# Altium PCB main.PcbDoc (part 2 of 2)
Units mm, origin at the board's own origin, x right, y up, seen from the top; angles counter-clockwise.
Board outline 184.25 x 118.77 mm, 4 copper layers (TopLayer, GND, VCC, BottomLayer); 161 components, 153 nets, 675 pads, 230 vias.
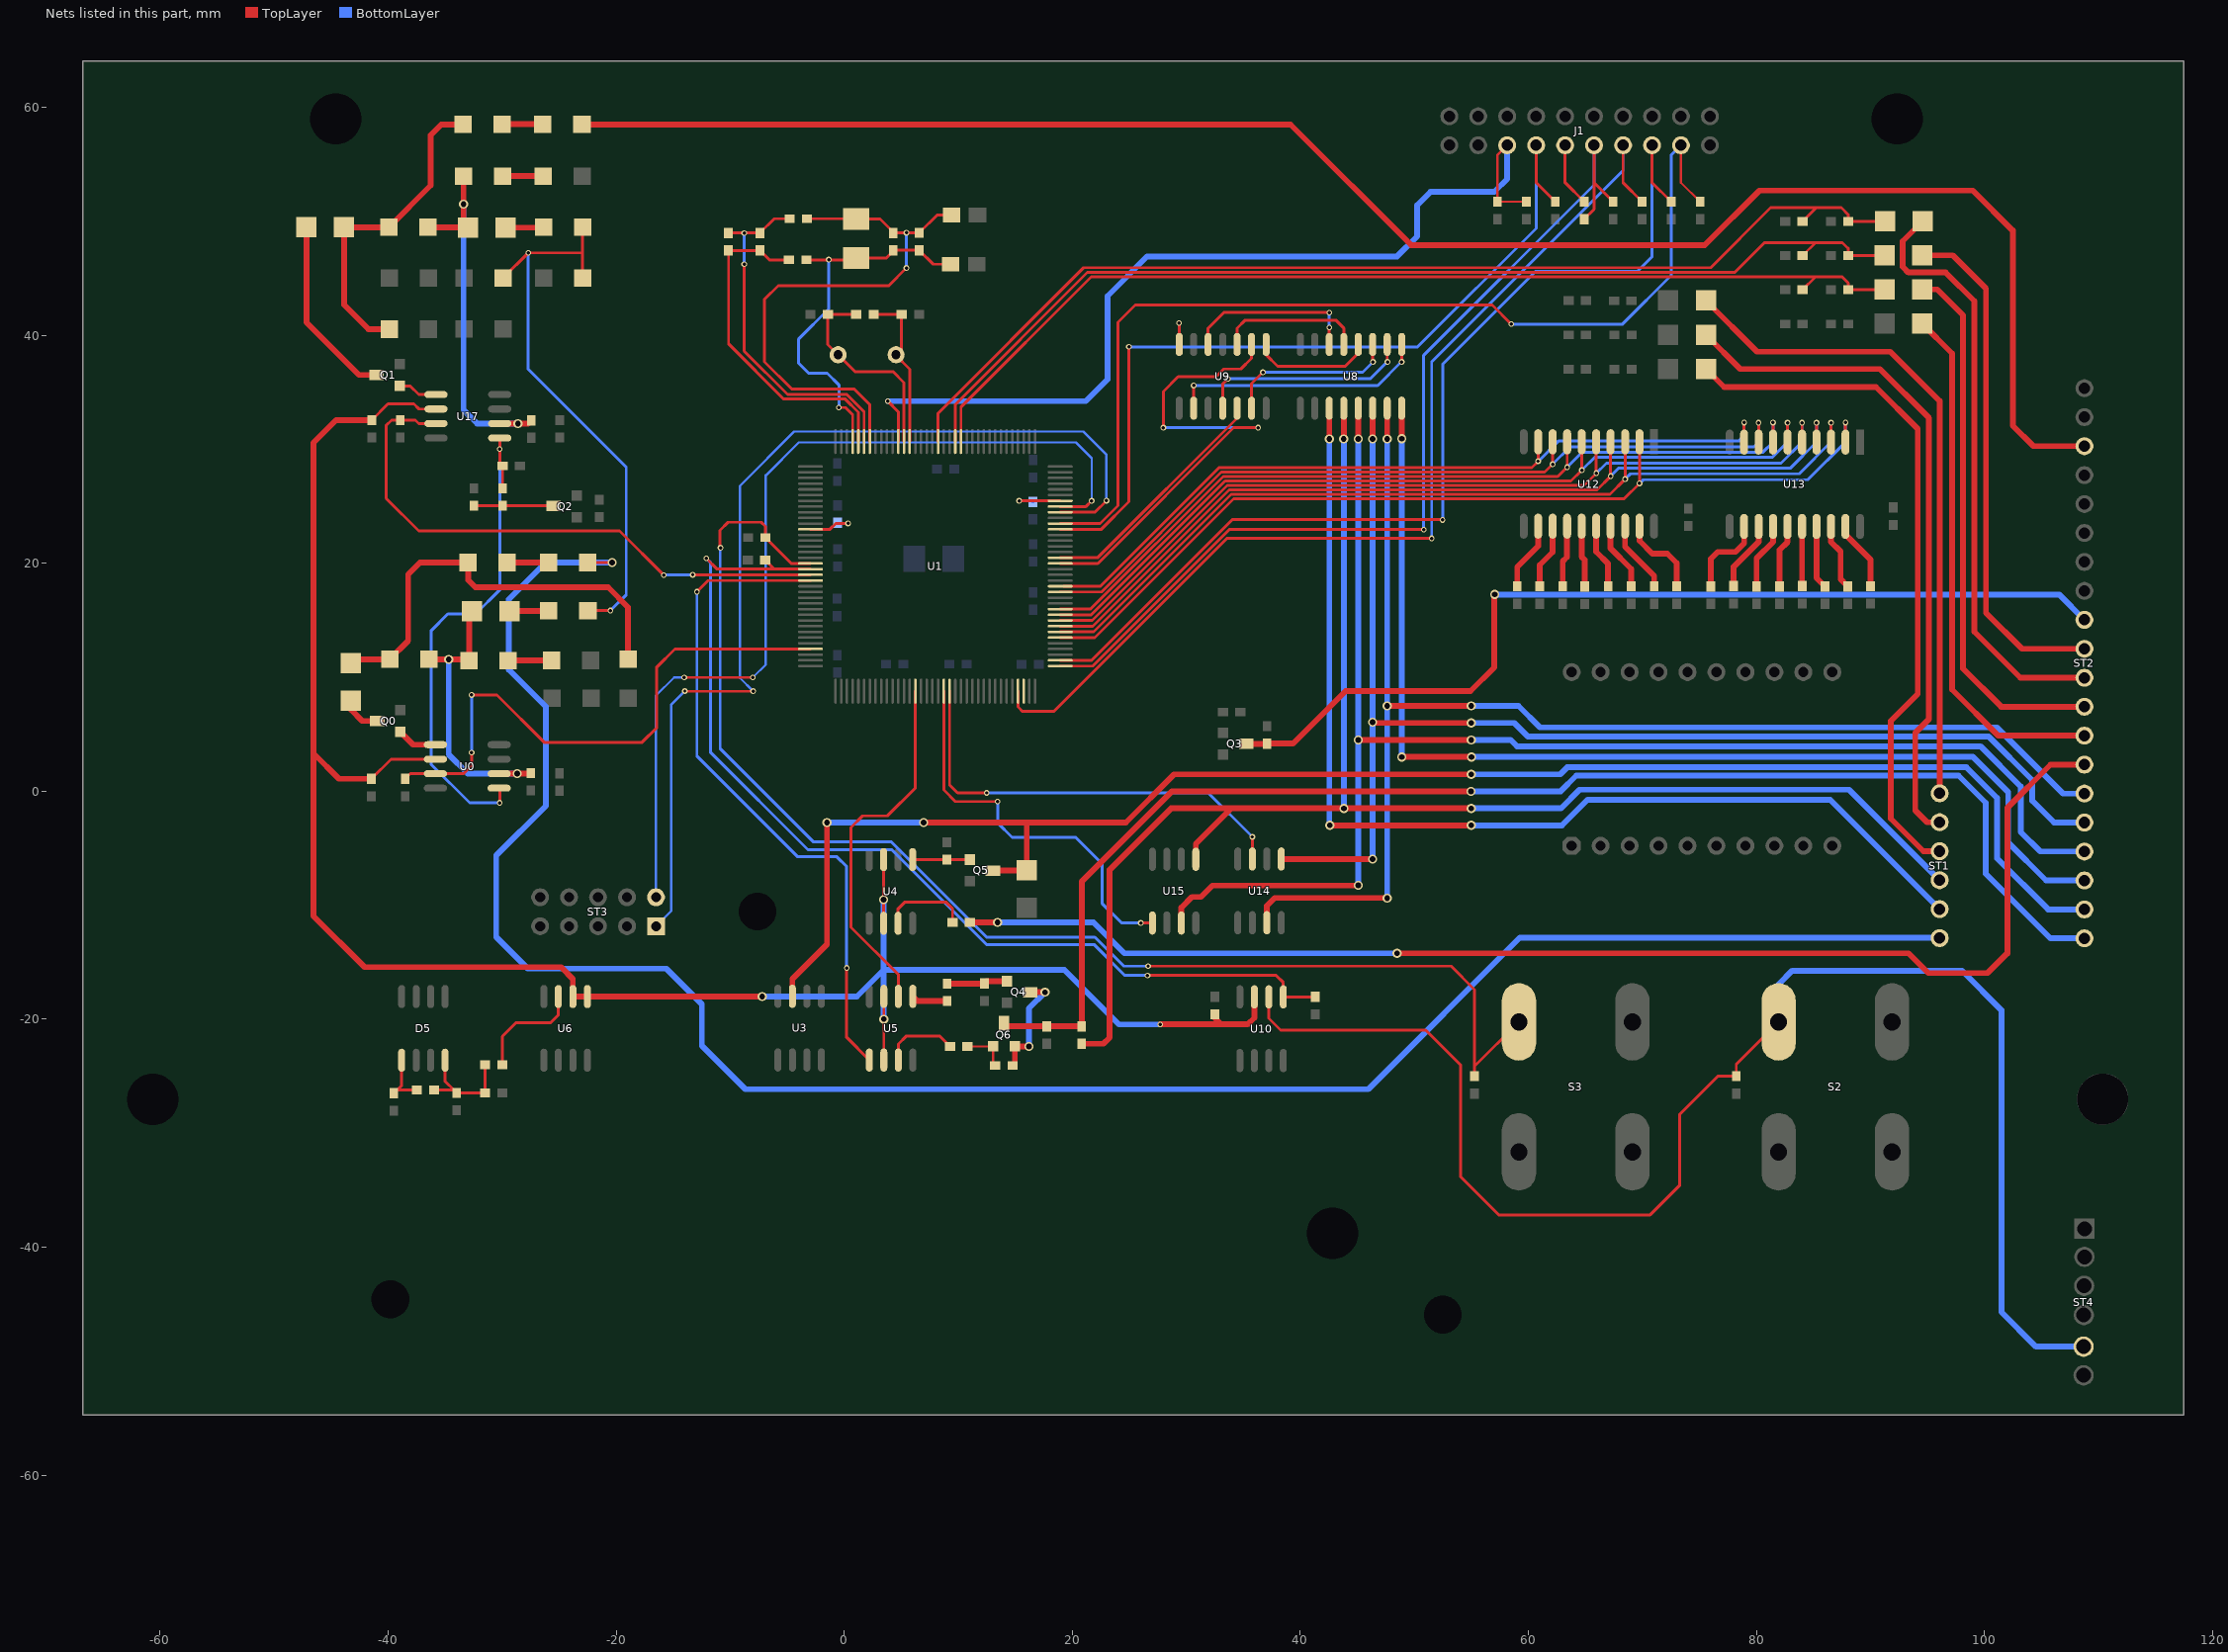
[diagram p4: the nets of this part, all layers, seen from the top]

## Via types
v1: diameter 0.5, hole 0.3, TopLayer to BottomLayer, 125 vias
v2: diameter 0.8, hole 0.5, TopLayer to BottomLayer, 97 vias
v3: diameter 1.27, hole 0.8, TopLayer to BottomLayer, 6 vias
v4: diameter 1.5, hole 0.8, TopLayer to BottomLayer, 2 vias

## Nets (pads, with @x,y where several pads share a name; then routed paths per layer and width w, separated by ;. In a path a pad name is that pad's centre, name@x,y a point inside that pad or via, vN(x,y) a via of type N, cw(c..) or ccw(c..) an arc to the next point about the centre after c; other vN are vias at no path point) (continued)
J1-1#: D6.2 ST2.11 | length 52.6
  TopLayer w0.508: D6.2@94.564,49.987 92.82,48.243 92.82,46.02 93.33,45.51 96.59,45.51 99.1,43 99.1,14 103.143,9.957 ST2.11@108.763,9.957
J1-2#: D7.2 ST2.10 | length 45.2
  TopLayer w0.508: D7.2@94.539,47.015 97.215,47.015 100.13,44.1 100.13,15.65 103.283,12.497 ST2.10@108.763,12.497
J1-3#: ST2.18 U8.16 | length 97.5
  TopLayer w0.508: v2(48.886,30.926) U8.16@48.886,33.603 ; v2@48.936,3.01 v2(55,3.01)
  BottomLayer w0.508: v2(48.886,3.01) v2(48.886,30.926) ; v2(55,3.01) 98.99,3.01 102.08,-0.08 102.08,-4.51 105.393,-7.823 ST2.18@108.763,-7.823
J1-5#: R49.2 ST2.3 | length 157.4
  TopLayer w0.508: R49.2@-23,58.49 39.14,58.49 49.73,47.9 75.46,47.9 80.26,52.7 98.97,52.7 102.48,49.19 102.48,32.08 104.283,30.277 ST2.3@108.763,30.277
J1-9#: D8.2 ST2.13 | length 46.5
  TopLayer w0.508: D8.2@94.539,41.021 97.15,38.41 97.15,8.93 101.203,4.877 ST2.13@108.763,4.877
J1-10#: D9.2 ST2.12 | length 47.5
  TopLayer w0.508: D9.2@94.539,44.018 95.852,44.018 98.11,41.76 98.11,10.77 101.463,7.417 ST2.12@108.763,7.417
J1-11#: ST2.15 U8.15 U14.3 | length 119.6
  TopLayer w0.508: U14.3@37.059,-11.532 37.059,-10.051 37.76,-9.35 v2@47.616,-9.35 ; v2(47.616,7.49) v2(54.98,7.49) ; v2(47.616,30.916) U8.15@47.616,33.603
  BottomLayer w0.508: v2(47.616,-9.38) v2(47.616,30.916) ; v2(54.98,7.49) 59.12,7.49 61.01,5.6 101.09,5.6 106.893,-0.203 ST2.15@108.763,-0.203
J1-12#: R18.2 ST2.14 | length 114.6
  TopLayer w0.508: R18.2@11.024,-11.506 v2(13.446,-11.506) ; v2(48.48,-14.21) 93.34,-14.21 95.08,-15.95 100.27,-15.95 102,-14.22 102,-1.458 105.795,2.337 ST2.14@108.763,2.337
  BottomLayer w0.508: v2(13.446,-11.506) 21.856,-11.506 24.56,-14.21 v2(48.48,-14.21)
J1-13#: Q6.3 R17.2 R20.1 ST2.20 | length 121
  TopLayer w0.508: Q6.3@14.026,-20.349 14.301,-20.624 R17.2@20.827,-20.624 20.827,-7.923 28.75,0 v2(54.97,0)
  BottomLayer w0.508: v2(54.97,0) 62.83,0 64.21,1.38 97.72,1.38 100.11,-1.01 100.11,-7.23 105.783,-12.903 ST2.20@108.763,-12.903
J1-14#: Q3.3 R40.1 ST2.9 | length 83.6
  TopLayer w0.508: Q3.3@35.255,4.166 37.062,4.166 R40.1@37.076,4.18 39.36,4.18 43.97,8.79 54.93,8.79 57,10.86 v2@57,17.26
  BottomLayer w0.508: v2@57,17.26 106.54,17.26 ST2.9@108.763,15.037
  other v2: 57.04,17.26
J1-15#: D4.2 Q5.3 ST2.19 U3.3 | length 144.2
  TopLayer w0.508: U3.3@-4.547,-17.983 -4.547,-16.467 -1.51,-13.43 v2(-1.51,-2.738) ; v2(6.972,-2.738) 24.692,-2.738 28.92,1.49 v2(54.99,1.49) ; Q5.3@13.03,-6.96 15.977,-6.96 D4.2@16.002,-6.934 16.002,-2.738
  BottomLayer w0.508: v2@-1.472,-2.738 v2(6.972,-2.738) ; v2(54.99,1.49) 62.79,1.49 63.4,2.1 98.42,2.1 101.11,-0.59 101.11,-5.89 105.583,-10.363 ST2.19@108.763,-10.363
J1-16#: ST2.16 U8.14 U14.5 | length 114.7
  TopLayer w0.508: U14.5@38.329,-5.944 v2@46.346,-5.94 ; v2@46.346,6 v2(54.98,6) ; v2(46.346,30.914) U8.14@46.346,33.603
  BottomLayer w0.508: v2(46.346,-5.96) v2(46.346,30.914) ; v2(54.98,6) 58.77,6 59.98,4.79 100.38,4.79 104.18,0.99 104.18,-0.82 106.103,-2.743 ST2.16@108.763,-2.743
  other v2: 46.346,6.06
J1-17#: ST2.17 U8.13 U15.3 | length 129.6
  TopLayer w0.508: U15.3@29.566,-11.557 29.566,-10.204 30.5,-9.27 31.29,-9.27 32.29,-8.27 45.066,-8.27 v2@45.076,-8.28 ; v2(45.076,4.5) v2(54.98,4.5) ; v2(45.076,30.916) U8.13@45.076,33.603
  BottomLayer w0.508: v2@45.076,-8.28 v2(45.076,30.916) ; v2(54.98,4.5) 58.45,4.5 59,3.95 99.64,3.95 103.17,0.42 103.17,-3.56 104.893,-5.283 ST2.17@108.763,-5.283
  other v2: 45.076,-8.25
J2-1#: D10.2 ST1.1 | length 58.6
  TopLayer w0.508: D10.2@75.565,43.049 80.054,38.56 91.74,38.56 96.063,34.237 ST1.1@96.063,-0.178
J2-2#: D11.2 ST1.2 | length 60.1
  TopLayer w0.508: D11.2@75.565,40.052 78.577,37.04 90.83,37.04 95.13,32.74 95.13,6.33 93.93,5.13 93.93,-1.69 94.958,-2.718 ST1.2@96.063,-2.718
J2-3#: D12.2 ST1.3 | length 61.4
  TopLayer w0.508: D12.2@75.565,37.054 77.159,35.46 90.48,35.46 94.14,31.8 94.14,8.53 91.78,6.17 91.78,-2.39 94.648,-5.258 ST1.3@96.063,-5.258
J2-4#: R17.1 ST1.4 U8.12 U15.5 | length 137.3
  TopLayer w0.508: R17.1@20.827,-22.148 22.732,-22.148 23.28,-21.6 23.28,-6.89 28.67,-1.5 v2(54.98,-1.5) ; U15.5@30.836,-5.969 30.836,-4.604 33.94,-1.5 ; v2@43.806,-1.48 v2(43.826,-1.5) ; v2(43.806,30.914) U8.12@43.806,33.603
  BottomLayer w0.508: v2@43.806,-1.5 v2(43.806,30.914) ; v2(54.98,-1.5) 62.85,-1.5 64.49,0.14 88.125,0.14 ST1.4@96.063,-7.798
J2-5#: ST1.5 U8.11 | length 95
  TopLayer w0.508: v2(42.536,30.916) U8.11@42.536,33.603 ; v2(42.576,-2.99) v2(54.98,-2.99)
  BottomLayer w0.508: v2@42.536,-2.99 v2(42.536,30.916) ; v2(54.98,-2.99) 62.94,-2.99 65.19,-0.74 86.465,-0.74 ST1.5@96.063,-10.338
J2-6#: R80.2 ST1.6 | length 185.2
  TopLayer w0.254: R80.2@-22.492,20.063 v2(-20.363,20.063)
  BottomLayer w0.508: v2(-20.363,20.063) -26.19,20.063 -29.42,16.833 -29.42,10.67 -26.17,7.42 -26.17,-1.28 -30.52,-5.63 -30.52,-12.79 -27.75,-15.56 -15.6,-15.56 -12.49,-18.67 -12.49,-22.32 -8.67,-26.14 45.96,-26.14 59.248,-12.852 ST1.6@96.26,-12.852
J9-3: J1.3 R11.1 U1.134 | length 90.8
  TopLayer w0.203: J1.3@73.381,56.667 73.381,53.391 R11.1@75.057,51.714
  TopLayer w0.254: U1.134@18.939,23.483 22.443,23.483 24.01,25.05 24.01,41.14 25.52,42.65 56.82,42.65 v1@58.49,40.98
  BottomLayer w0.254: v1(58.5,40.98) 68.26,40.98 72.53,45.25 72.53,55.817 J1.3@73.381,56.667
J9-5: J1.5 R10.1 U1.110 | length 90
  TopLayer w0.254: U1.110@18.939,11.483 21.69,11.483 34.037,23.83 v1@52.48,23.83 ; J1.5@70.841,56.667 70.841,53.391 R10.1@72.517,51.714
  BottomLayer w0.254: v1(52.48,23.8) 52.48,37.45 60.65,45.62 69.58,45.62 70.841,46.881 J1.5@70.841,56.667
J9-7: J1.7 R9.1 U1.105 | length 91.2
  TopLayer w0.254: U1.105@15.239,8.783 15.239,7.401 15.64,7 18.38,7 33.56,22.18 v1(51.52,22.18) ; J1.7@68.301,56.667 68.301,53.391 R9.1@69.977,51.714
  BottomLayer w0.254: v1(51.52,22.18) 51.52,37.67 68.301,54.451 J1.7@68.301,56.667
J9-9: J1.9 R8.1 R12.2 U1.109 | length 86
  TopLayer w0.254: U1.109@18.939,10.983 21.783,10.983 33.78,22.98 v1@50.82,22.98 ; R12.2@64.897,50.19 65.761,51.054 J1.9@65.761,56.667 ; 65.761,53.391 R8.1@67.437,51.714
  BottomLayer w0.254: v1(50.82,22.95) 50.82,38.25 65.761,53.191 J1.9@65.761,56.667
J9-11: J1.11 R12.1 | length 5.6
  TopLayer w0.254: J1.11@63.221,56.667 63.221,53.391 R12.1@64.897,51.714
J9-13: J1.13 R7.1 U1.133 | length 73.6
  TopLayer w0.254: U1.133@18.939,22.983 22.553,22.983 24.97,25.4 v1(24.97,38.99) ; J1.13@60.681,56.667 60.681,53.391 R7.1@62.357,51.714
  BottomLayer w0.254: v1(24.97,38.99) 50.29,38.99 60.681,49.381 J1.13@60.681,56.667
JDQ_PW1: U1.87 U5.2 | length 32.1
  TopLayer w0.254: U5.2@4.742,-17.993 4.742,-16.072 0.6,-11.93 0.6,-3.17 1.61,-2.16 3.785,-2.16 6.239,0.294 U1.87@6.239,8.783
JDQ_PW2: U1.57 U5.5 | length 59.7
  TopLayer w0.254: v1(-12.92,17.5) -11.937,18.483 U1.57@-2.961,18.483 ; v1(0.214,-15.5) 0.214,-21.593 U5.5@2.202,-23.581
  BottomLayer w0.254: v1(-12.92,17.5) -12.92,3.09 -4.08,-5.75 -0.64,-5.75 0.214,-6.604 v1(0.214,-15.5)
KEY_START: C43.1 R79.2 S3.1 U1.54 | length 117.5
  TopLayer w0.254: v1@-10.88,21.36 -10.89,21.37 -10.89,22.89 -10.18,23.6 -7.28,23.6 -6.909,23.229 R79.2@-6.909,22.25 -4.642,19.983 U1.54@-2.961,19.983 ; v1(26.65,-15.34) 53.22,-15.34 55.27,-17.39 C43.1@55.27,-24.994 ; 55.27,-24.132 S3.1@59.169,-20.233
  BottomLayer w0.254: v1@-10.88,21.36 -10.88,3.74 -2.69,-4.45 4.14,-4.45 12.49,-12.8 21.98,-12.8 24.52,-15.34 v1(26.65,-15.34)
  other v1: -10.85,21.36
KEY_STOP: C42.2 S2.1 ST4.5 U10.2 | length 130.4
  TopLayer w0.254: U10.2@37.236,-18.034 37.236,-19.926 38.26,-20.95 50.99,-20.95 54.07,-24.03 54.07,-33.84 57.39,-37.16 70.68,-37.16 73.25,-34.59 73.25,-28.37 76.626,-24.994 C42.2@78.232,-24.994 78.232,-23.942 S2.1@81.941,-20.233
  BottomLayer w0.508: S2.1@81.941,-20.233 81.941,-16.939 83.14,-15.74 98.02,-15.74 101.48,-19.2 101.48,-45.68 104.517,-48.717 ST4.5@108.616,-48.717
LED1: U1.114 U12.2 U13.2 | length 83
  TopLayer w0.254: U1.114@18.939,13.483 21.973,13.483 34.14,25.65 68.388,25.65 v1(69.748,27.01) U12.2@69.748,30.658 ; U13.2@87.808,30.632 v1(87.808,32.34)
  BottomLayer w0.254: v1(69.748,27.01) 70.068,27.33 84.505,27.33 87.808,30.632 v1(87.808,32.34)
LED2: U1.115 U12.3 U13.3 | length 81.2
  TopLayer w0.254: U1.115@18.939,13.983 21.871,13.983 33.945,26.057 67.157,26.057 68.478,27.378 U12.3@68.478,30.658 ; U13.3@86.538,30.632 v1(86.538,32.334)
  BottomLayer w0.254: v1(68.49,27.388) 68.952,27.85 83.75,27.85 86.538,30.638 v1(86.538,32.334)
LED3: U1.116 U12.4 U13.4 | length 79.4
  TopLayer w0.254: U1.116@18.939,14.483 21.79,14.483 33.757,26.45 66.02,26.45 67.208,27.638 U12.4@67.208,30.658 ; U13.4@85.268,30.632 v1(85.268,32.33)
  BottomLayer w0.254: v1@67.208,27.66 67.878,28.33 82.96,28.33 85.268,30.638 v1(85.268,32.33)
  other v1: 67.208,27.646
LED4: U1.117 U12.5 U13.5 | length 77.7
  TopLayer w0.254: U1.117@18.939,14.983 21.743,14.983 33.598,26.838 64.898,26.838 65.938,27.878 U12.5@65.938,30.658 ; U13.5@83.998,30.632 v1(83.998,32.334)
  BottomLayer w0.254: v1(65.957,27.907) 66.84,28.79 82.16,28.79 83.998,30.628 v1(83.998,32.334)
LED5: U1.118 U12.6 U13.6 | length 75.9
  TopLayer w0.254: U1.118@18.939,15.483 21.653,15.483 33.397,27.227 63.737,27.227 64.668,28.158 U12.6@64.668,30.658 ; U13.6@82.728,30.632 v1(82.728,32.334)
  BottomLayer w0.254: v1(64.687,28.167) 65.819,29.3 81.395,29.3 82.728,30.632 v1(82.728,32.334)
LED6: U1.119 U12.7 U13.7 | length 74.2
  TopLayer w0.254: U1.119@18.939,15.983 21.603,15.983 33.23,27.61 62.57,27.61 63.398,28.438 U12.7@63.398,30.658 ; U13.7@81.458,30.632 v1(81.458,32.34)
  BottomLayer w0.254: v1(63.398,28.432) 64.718,29.75 80.575,29.75 81.458,30.632 v1(81.458,32.34)
LED7: U1.122 U12.8 U13.8 | length 72.1
  TopLayer w0.254: U1.122@18.939,17.483 22.563,17.483 33.077,27.997 61.437,27.997 v1(62.128,28.686) U12.8@62.128,30.658 ; U13.8@80.188,30.632 v1(80.188,32.33)
  BottomLayer w0.254: v1(62.128,28.686) 63.662,30.22 79.775,30.22 80.188,30.632 v1(80.188,32.33)
LED8: U1.123 U12.9 U13.9 | length 69.7
  TopLayer w0.254: U1.123@19.247,17.983 22.47,17.983 32.867,28.38 60.298,28.38 60.858,28.94 U12.9@60.858,30.658 ; U13.9@78.918,30.632 v1(78.918,32.342)
  BottomLayer w0.254: v1@60.858,28.94 62.668,30.75 78.498,30.75 78.918,31.17 v1(78.918,32.342)
  other v1: 60.858,28.953
LZ_PW: C37.1 U1.56 U17.3 | length 51.1
  TopLayer w0.254: U17.3@-35.802,32.26 -37.319,32.26 -37.624,32.565 -39.695,32.565 -40.16,32.1 -40.16,25.69 -37.32,22.85 -19.7,22.85 v1(-15.815,18.965) ; v1(-13.287,18.983) U1.56@-2.961,18.983
  BottomLayer w0.254: v1@-15.815,18.983 v1(-13.287,18.983)
LZ_PW_2: C53.1 U0.3 U1.69 | length 50.4
  TopLayer w0.254: C53.1@-38.494,1.089 -38.037,1.546 -33.384,1.546 -32.68,2.25 v1(-32.68,3.4) ; v1@-32.68,8.44 -30.46,8.44 -26.315,4.295 -17.725,4.295 -16.44,5.58 -16.44,10.896 -14.853,12.483 U1.69@-2.961,12.483
  BottomLayer w0.254: v1(-32.68,3.4) v1(-32.68,8.45)
NC: U1.106
NetC21_1: C21.1 D5.8 R13.2 R14.2 R16.1 | length 10
  TopLayer w0.254: R14.2@-35.966,-26.213 R13.2@-34.239,-26.213 ; D5.8@-35.001,-23.597 -35.001,-25.451 R13.2@-34.239,-26.213 ; R16.1@-31.496,-24.003 C21.1@-31.496,-26.467 R13.2@-33.985,-26.467 R13.2@-34.239,-26.213
NetC35_2: C35.2 D1.2 R50.1 R51.1 | length 28.4
  TopLayer w0.508: C35.2@-39.891,40.532 -41.721,40.532 -43.866,42.677 -43.866,49.473 R51.1@-39.942,49.473 -36.272,53.142 -36.272,57.558 -35.34,58.49 -33.439,58.49 R50.1@-33.414,58.515
NetC38_1: C38.1 D2.2 R51.2 R53.2 U17.6 | length 33.8
  TopLayer w0.254: C38.1@-27.72,32.26 C38.1@-27.445,32.534
  TopLayer w0.508: R51.2@-36.513,49.473 D2.2@-33.013,49.473 ; D2.2@-33.389,49.849 R53.2@-33.389,53.969 ; U17.6@-30.214,32.26 C38.1@-27.72,32.26
  BottomLayer w0.508: v2@-33.389,51.493 -33.389,33.449 -32.199,32.26 v2(-28.622,32.26)
  other v2: -33.389,51.503
NetC39_1: C39.1 R58.1 U0.5 U17.5 | length 44.9
  TopLayer w0.254: v1(-30.214,-1.014) U0.5@-30.214,0.34 ; U17.5@-30.214,30.99 -30.214,28.801 C39.1@-29.96,28.547 R58.1@-29.96,26.565
  BottomLayer w0.254: v1(-30.214,-1.014) -32.854,-1.014 -36.21,2.342 -36.21,14.1 -34.766,15.544 -32.33,15.544 -30.214,17.66 v1(-30.214,30.02)
NetC50_2: C50.2 D13.2 R81.1 R84.1 | length 38.3
  TopLayer w0.508: D13.2@-43.256,11.557 R84.1@-39.883,11.557 ; R84.1@-39.864,11.576 -38.24,13.2 -38.24,19.02 -37.197,20.063 R81.1@-32.982,20.063 -32.982,18.522 -32.35,17.89 -20.71,17.89 -18.961,16.141 C50.2@-18.961,11.579
NetC51_1: C51.1 D14.2 R83.2 R84.2 U0.6 | length 25.6
  TopLayer w0.508: R84.2@-36.435,11.576 R83.2@-33.015,11.576 ; R83.2@-32.896,11.457 -32.896,15.546 D14.2@-32.642,15.8 ; U0.6@-30.264,1.546 C51.1@-27.547,1.546
  BottomLayer w0.508: v2@-34.69,11.576 -34.69,3.23 -33.006,1.546 v2(-28.68,1.546)
  other v2: -34.684,11.57
NetD1_1: D1.1 Q1.3 | length 16.5
  TopLayer w0.508: D1.1@-47.168,49.505 -47.168,41.139 -42.551,36.522 Q1.3@-40.953,36.522
NetD2_1: D2.1 R54.1 | length 3.3
  TopLayer w0.508: D2.1@-29.68,49.442 -26.409,49.442 R54.1@-26.378,49.473
NetD5_5: D5.5 R14.1 R15.2 | length 4.9
  TopLayer w0.254: R15.2@-39.497,-26.492 -38.811,-25.806 D5.5@-38.811,-23.597 ; R15.2@-39.218,-26.213 R14.1@-37.49,-26.213
NetD13_1: D13.1 Q0.3 | length 3.5
  TopLayer w0.508: D13.1@-43.256,7.95 -43.256,7.156 -42.269,6.169 Q0.3@-40.958,6.169
NetD14_1: D14.1 R85.1 | length 3.5
  TopLayer w0.508: D14.1@-29.34,15.8 -25.962,15.8 R85.1@-25.911,15.851
NetQ0_1: Q0.1 U0.1 | length 3.5
  TopLayer w0.508: Q0.1@-38.926,5.204 -37.808,4.086 U0.1@-35.852,4.086
NetQ1_1: Q1.1 U17.1 | length 3.5
  TopLayer w0.254: Q1.1@-38.977,35.557 -38.066,35.557 -37.309,34.8 U17.1@-35.802,34.8
NetQ2_3: Q2.3 R58.2 R59.1 | length 7
  TopLayer w0.254: R59.1@-32.474,25.041 Q2.3@-25.515,25.041
NetQ4_1: Q4.1 R23.2 R24.1 | length 5.3
  TopLayer w0.508: R23.2@9.016,-16.88 12.279,-16.88 12.496,-16.663 Q4.1@14.274,-16.663
NetQ4_3: Q4.3 Q6.2 R22.2 | length 9.6
  TopLayer w0.508: R22.2@14.762,-24.057 14.966,-23.854 Q6.2@14.966,-22.381 v2(16.189,-22.381) ; Q4.3@16.306,-17.628 v2(17.608,-17.628)
  BottomLayer w0.508: v2(16.189,-22.381) 16.189,-19.047 v2(17.608,-17.628)
NetQ5_1: Q5.1 R19.1 U4.1 | length 5
  TopLayer w0.254: U4.1@5.994,-5.994 Q5.1@10.998,-5.994
NetQ6_1: Q6.1 R21.2 R22.1 | length 4
  TopLayer w0.203: R21.2@10.8,-22.381 Q6.1@13.061,-22.381 13.061,-23.879 R22.1@13.238,-24.057
NetR5_1: R5.1 U1.138 | length 4.8
  TopLayer w0.254: v1(15.343,25.483) U1.138@18.939,25.483
  BottomLayer w0.254: v1(15.343,25.483) 16.427,25.483 R5.1@16.535,25.375
NetR6_1: R6.1 U1.48 | length 4.4
  TopLayer w0.254: U1.48@-2.961,22.983 -1.257,22.983 -0.74,23.5 v1(0.34,23.5)
  BottomLayer w0.254: R6.1@-0.538,23.5 v1(0.34,23.5)
NetR16_2: R16.2 U6.3 | length 9.8
  TopLayer w0.254: R16.2@-29.972,-24.003 -29.972,-21.502 -28.76,-20.29 -25.727,-20.29 -25.07,-19.632 U6.3@-25.07,-18.009
NetR18_1: R18.1 U4.7 | length 7.7
  TopLayer w0.254: U4.7@4.724,-11.582 4.724,-10.306 5.29,-9.74 8.94,-9.74 9.5,-10.3 R18.1@9.5,-11.506
NetR21_1: R21.1 U5.7 | length 6.6
  TopLayer w0.254: U5.7@4.742,-23.581 4.742,-22.168 5.42,-21.49 8.385,-21.49 R21.1@9.276,-22.381
NetR23_1: R23.1 U5.1 | length 3.2
  TopLayer w0.508: U5.1@6.012,-17.993 6.423,-18.404 R23.1@9.016,-18.404
NetR49_1: R49.1 R50.2 | length 3.5
  TopLayer w0.508: R50.2@-29.985,58.515 R49.1@-26.454,58.515
NetR52_2: R52.2 R53.1 | length 3.6
  TopLayer w0.508: R53.1@-29.96,53.969 R52.2@-26.404,53.969
NetR54_2: R54.2 R55.1 R57.1 R85.2 | length 49.8
  TopLayer w0.254: R55.1@-29.909,45.033 v1(-27.709,47.233) -22.949,47.233 ; R57.1@-22.949,45.003 R54.2@-22.949,49.473 ; R85.2@-22.482,15.851 v1(-20.5,15.851)
  BottomLayer w0.254: v1(-27.709,47.233) -27.709,37.029 -19.12,28.44 -19.12,17.231 v1(-20.5,15.851)
NetR62_1: R62.1 U12.19 | length 7.4
  TopLayer w0.508: U12.19@69.748,23.258 69.748,21.972 70.87,20.85 72.18,20.85 73.012,20.018 R62.1@73.012,17.977
NetR63_1: R63.1 U12.18 | length 6.3
  TopLayer w0.508: U12.18@68.478,23.258 68.478,21.452 71.031,18.899 R63.1@71.031,17.977
NetR64_1: R64.1 U12.17 | length 6
  TopLayer w0.508: U12.17@67.208,23.258 67.208,21.312 69.024,19.496 R64.1@69.024,17.977
NetR65_1: R65.1 U12.16 | length 5.7
  TopLayer w0.508: U12.16@65.938,23.258 65.938,21.012 66.992,19.958 R65.1@66.992,17.977
NetR66_1: R66.1 U12.15 | length 5.4
  TopLayer w0.508: U12.15@64.668,23.258 64.668,20.574 64.935,20.308 R66.1@64.935,17.952
NetR67_1: R67.1 U12.14 | length 5.4
  TopLayer w0.508: R67.1@63.004,17.977 63.004,20.18 63.373,20.549 U12.14@63.373,23.241
NetR68_1: R68.1 U12.13 | length 5.7
  TopLayer w0.508: R68.1@60.998,17.977 60.998,19.848 62.128,20.978 U12.13@62.128,23.258
NetR69_1: R69.1 U12.12 | length 6
  TopLayer w0.508: R69.1@59.016,17.977 59.016,19.676 60.858,21.518 U12.12@60.858,23.258
NetR70_1: R70.1 U13.19 | length 6.2
  TopLayer w0.508: U13.19@87.808,23.232 87.808,22.51 89.98,20.338 89.992,20.338 R70.1@89.992,17.983
NetR71_1: R71.1 U13.18 | length 5.9
  TopLayer w0.508: U13.18@86.538,23.232 86.538,21.876 87.373,21.041 87.373,18.61 87.946,18.036 R71.1@88.011,17.972
NetR72_1: R72.1 U13.17 | length 5.6
  TopLayer w0.508: U13.17@85.268,23.232 85.268,18.709 R72.1@86.004,17.972
NetR73_1: R73.1 U13.16 | length 5.2
  TopLayer w0.508: R73.1@83.998,18.023 U13.16@83.998,23.232
NetR74_1: R74.1 U13.15 | length 5.5
  TopLayer w0.508: R74.1@82.017,18 82.017,21.165 82.728,21.876 U13.15@82.728,23.232
NetR75_1: R75.1 U13.14 | length 5.9
  TopLayer w0.508: R75.1@80.01,17.972 80.01,20.429 81.458,21.876 U13.14@81.458,23.232
NetR76_1: R76.1 U13.13 | length 6.1
  TopLayer w0.508: R76.1@78.003,17.997 78.003,19.692 80.188,21.876 U13.13@80.188,23.232
NetR77_1: R77.1 U13.12 | length 7.4
  TopLayer w0.508: R77.1@75.997,17.972 75.997,20.387 76.61,21 78.17,21 78.918,21.748 U13.12@78.918,23.232
NetR80_1: R80.1 R81.2 | length 3.6
  TopLayer w0.508: R81.2@-29.553,20.063 R80.1@-25.921,20.063
NetR82_2: R82.2 R83.1 | length 3.8
  TopLayer w0.508: R83.1@-29.442,11.482 R82.2@-25.682,11.482
NetU8_1: U8.1 U9.2 | length 22.6
  TopLayer w0.254: U9.2@30.645,33.603 v1(30.645,35.6) ; v1@48.886,37.667 U8.1@48.886,39.191
  BottomLayer w0.254: v1(30.645,35.6) 46.783,35.6 v1@48.85,37.667
  other v1: 48.89,37.667
NetU8_2: U8.2 U9.4 | length 18.9
  TopLayer w0.254: U9.4@33.185,33.603 33.185,35.72 v1(33.645,36.18) ; v1@47.616,37.667 U8.2@47.616,39.191
  BottomLayer w0.254: v1(33.645,36.18) 46.129,36.18 v1@47.616,37.667
  other v1: 47.64,37.667
NetU8_3: U8.3 U9.6 | length 15.1
  TopLayer w0.254: U9.6@35.725,33.603 35.725,35.755 v1(36.72,36.75) ; v1@46.346,37.667 U8.3@46.346,39.191
  BottomLayer w0.254: v1(36.72,36.75) 45.463,36.75 v1@46.38,37.667
  other v1: 46.37,37.667
NetU8_4: U8.4 U9.8 | length 10.6
  TopLayer w0.254: U9.8@36.995,39.191 36.995,38.302 38.017,37.28 43.93,37.28 45.076,38.426 U8.4@45.076,39.191
NetU8_5: U8.5 U9.10 | length 12.8
  TopLayer w0.254: U9.10@34.455,39.191 34.455,40.615 35.17,41.33 43.11,41.33 43.806,40.634 U8.5@43.806,39.191
NetU8_6: U8.6 U9.12 | length 15.4
  TopLayer w0.254: U9.12@31.915,39.191 31.915,40.615 33.3,42 v1@42.52,42 ; U8.6@42.536,39.191 v1(42.536,40.686)
  BottomLayer w0.254: v1(42.536,40.686) v1(42.536,41.984)
OSC_IN: C1.2 R1.1 U1.23 Y1.2 | length 14.1
  TopLayer w0.254: R1.1@2.575,41.835 C1.2@5.039,41.835 5,41.796 Y1.2@5,38.294 ; Y1.2@4.51,38.257 5.739,37.029 U1.23@5.739,30.683
OSC_OUT: C2.2 R1.2 U1.24 Y1.1 | length 18.4
  TopLayer w0.254: R1.2@1.051,41.835 C2.2@-1.438,41.835 -1.438,39.199 Y1.1@-0.533,38.294 0.961,36.8 4.3,36.8 5.239,35.861 U1.24@5.239,30.683
PW_CK: C31.1 D9.1 R45.1 U1.14 | length 91.2
  TopLayer w0.254: U1.14@10.239,30.683 10.239,33.709 21.66,45.13 87.513,45.13 88.062,44.581 C31.1@88.062,43.993 D9.1@91.211,43.993 ; R45.1@84.049,43.993 85.186,45.13
RESET_S: C29.1 D7.1 R43.1 U1.15 | length 93.2
  TopLayer w0.203: R43.1@84.049,46.99 85.189,48.13
  TopLayer w0.254: U1.15@9.739,30.683 9.739,33.929 21.327,45.517 78.097,45.517 80.7,48.12 87.54,48.12 88.01,47.65 ; 88.033,47.627 88.062,47.599 C29.1@88.062,46.99 D7.1@91.37,46.99
RST: C3.1 J1.15 R2.1 U1.25 | length 83
  TopLayer w0.203: J1.15@58.141,56.667 57.277,55.804 C3.1@57.277,51.714 R2.1@59.817,51.714
  TopLayer w0.254: v1(3.82,34.22) 4.739,33.301 U1.25@4.739,30.683
  BottomLayer w0.508: v1(3.82,34.22) 21.18,34.22 23.09,36.13 23.09,43.44 26.57,46.92 48.48,46.92 50.25,48.69 50.25,51.41 51.42,52.58 57,52.58 58.141,53.721 J1.15@58.141,56.667
RX: ST3.2 U1.137 | length 82.1
  TopLayer w0.203: v1@-14.04,9.98 v1(-8.01,9.98)
  TopLayer w0.254: U1.137@18.939,24.983 21.203,24.983 v1(21.7,25.48)
  BottomLayer w0.203: ST3.2@-16.51,-9.296 -16.51,8.39 -14.92,9.98 v1(-14.03,9.98) ; v1(-8.01,9.98) -6.88,11.11 -6.88,27.71 -3.99,30.6 20.32,30.6 21.7,29.22 v1(21.7,25.48)
START_S: C28.1 D6.1 R42.1 U1.18 | length 95.5
  TopLayer w0.254: U1.18@8.239,30.683 8.239,33.169 21,45.93 75.99,45.93 81.25,51.19 87.448,51.19 88.062,50.576 C28.1@88.062,49.987 D6.1@91.262,49.987 ; R42.1@84.049,49.987 85.251,51.19
STOP: R78.1 R87.1 U1.55 U10.1 | length 90.5
  TopLayer w0.254: v1@-12.11,20.45 -11.143,19.483 U1.55@-2.961,19.483 ; R78.1@-6.934,20.295 -6.123,19.483 ; v1(26.6,-16.16) 37.89,-16.16 38.506,-16.776 U10.1@38.506,-18.034 R87.1@41.3,-18.034
  BottomLayer w0.254: v1@-12.11,20.45 -11.71,20.05 -11.71,3.39 -3.18,-5.14 4.17,-5.14 12.47,-13.44 21.9,-13.44 24.62,-16.16 v1(26.6,-16.16)
  other v1: -12.103,20.443
TX: ST3.1 U1.136 | length 89.6
  TopLayer w0.203: v1@-13.98,8.78 v1(-7.99,8.78)
  TopLayer w0.254: U1.136@18.939,24.483 21.993,24.483 v1(23,25.49)
  BottomLayer w0.203: ST3.1@-16.51,-11.836 -15.16,-10.486 -15.16,7.61 v1(-13.98,8.79) ; v1(-7.99,8.78) -9.15,9.94 -9.15,26.79 -4.39,31.55 20.97,31.55 23,29.52 v1(23,25.49)
V1_C: U1.128 U9.5 | length 22
  TopLayer w0.254: U1.128@18.939,20.483 22.203,20.483 34.455,32.735 U9.5@34.455,34.133
V1_C_FB: U1.93 U14.7 | length 38.6
  TopLayer w0.254: U1.93@9.239,8.783 9.239,0.561 9.94,-0.14 v1(12.5,-0.14) ; U14.7@35.789,-5.944 v1(35.789,-4.001)
  BottomLayer w0.254: v1(12.5,-0.14) 31.927,-0.14 v1(35.789,-4.001)
V2_C: U1.127 U9.9 | length 43.9
  TopLayer w0.254: U1.127@18.939,19.983 22.243,19.983 34.16,31.9 v1(36.29,31.9) ; v1(27.99,31.9) 27.99,35.07 29.28,36.36 32.61,36.36 33.29,37.04 34.78,37.04 35.725,37.985 U9.9@35.725,39.191
  BottomLayer w0.254: v1(27.99,31.9) v1(36.29,31.9)
V2_C_FB: U1.92 U15.1 | length 34.9
  TopLayer w0.254: U1.92@8.739,8.783 8.739,0.111 9.75,-0.9 v1(13.45,-0.9) ; v1(26.01,-11.557) U15.1@27.026,-11.557
  BottomLayer w0.254: v1(13.45,-0.9) 13.45,-2.77 14.722,-4.042 20.302,-4.042 22.6,-6.34 22.6,-9.827 24.33,-11.557 v1(26.01,-11.557)
V_REF: C36.1 C52.1 C56.1 U0.2 U4.3 U4.6 U5.3 U5.6 U6.1 U6.2 U10.3 U17.2 | length 180.7
  TopLayer w0.254: C52.1@-41.466,1.089 -39.739,2.816 U0.2@-35.72,2.816 ; C36.1@-41.441,32.565 -40.013,33.993 -37.752,33.993 -37.289,33.53 U17.2@-35.802,33.53 ; U4.3@3.454,-5.994 U4.6@3.454,-11.582 U4.6@3.472,-11.6 ; U5.6@3.472,-23.581 U5.3@3.472,-17.993
  TopLayer w0.508: -46.55,3.32 -44.319,1.089 C52.1@-41.466,1.089 ; C36.1@-41.441,32.714 C36.1@-41.441,32.565 -44.555,32.565 -46.55,30.57 -46.55,-10.95 -42.07,-15.43 -24.83,-15.43 -23.8,-16.46 U6.2@-23.8,-18.009 v2@-7.24,-18.009 ; v1@27.72,-20.45 35.38,-20.45 35.966,-19.864 U10.3@35.966,-18.034 ; C56.1@32.512,-19.558 32.512,-19.892 33.07,-20.45
  BottomLayer w0.508: v2@-7.24,-18.009 1.111,-18.009 3.46,-15.66 19.3,-15.66 24.1,-20.46 v1(27.72,-20.46) ; v2@3.454,-9.47 3.454,-19.992 v2@3.472,-20.01
  other v2: 3.472,-19.99 -7.19,-18.009 3.454,-9.5
VCC: U9.14 | length 1.9
  TopLayer w0.254: U9.14@29.375,39.191 v1@29.375,41.085
  other v1: 29.37,41.07
VDDA: C4.1 C5.1 C6.1 L2.2 R3.2 U1.33 | length 33.8
  TopLayer w0.254: R3.2@-3.323,46.617 0.894,46.617 C6.1@1.046,46.769 3.688,46.769 4.374,47.455 C4.1@6.583,47.455 7.803,46.236 L2.2@9.327,46.236 ; v1@-0.5,33.66 0.11,33.66 0.739,33.031 U1.33@0.739,30.683
  BottomLayer w0.254: v1(-1.36,46.64) -1.36,42.31 -3.99,39.68 -3.99,37.54 -3.12,36.67 -1.49,36.67 -0.47,35.65 v1(-0.47,33.66)
VREF+: C7.1 C8.1 R3.1 U1.32 | length 30.3
  TopLayer w0.254: C8.1@-10.155,47.452 C8.1@-10.146,47.443 ; R3.1@-4.847,46.617 -6.56,46.617 C7.1@-7.387,47.443 C8.1@-10.146,47.443 ; U1.32@1.239,30.683 1.239,33.251 0.09,34.4 -5.3,34.4 -10.146,39.246 C8.1@-10.146,47.443
VREF-: C7.2 C8.2 R4.1 U1.31 | length 31.6
  TopLayer w0.254: C8.2@-10.155,48.976 -7.377,48.976 -6.13,50.223 R4.1@-4.796,50.223 ; v1(-8.77,46.24) -8.77,38.61 -4.961,34.801 0.23,34.801 1.739,33.292 U1.31@1.739,30.683
  BottomLayer w0.254: v1(-8.77,46.24) v1(-8.77,48.976)
VSSA: C4.2 C5.2 C6.2 L1.2 R4.2 U1.30 | length 50
  TopLayer w0.254: R4.2@-3.272,50.223 1.021,50.223 C6.2@1.046,50.198 3.154,50.198 4.374,48.979 C4.2@6.583,48.979 8.158,50.554 L1.2@9.403,50.554 ; U1.30@2.239,30.683 2.239,33.921 0.86,35.3 -4.62,35.3 -6.99,37.67 -6.99,43.16 -5.79,44.36 3.91,44.36 v1@5.41,45.86
  BottomLayer w0.254: v1(5.45,45.9) v1(5.45,48.99)
pads on no net: D5.1 D5.2 D5.3 D5.6 D5.7 J1.17 J1.19 S3.3 S3.4 U1.1 U1.2 U1.3 U1.4 U1.5 U1.6 U1.7 U1.8 U1.9 U1.19 U1.20 U1.21 U1.22 U1.26 U1.27 U1.28 U1.29 U1.34 U1.35 U1.36 U1.37 U1.40 U1.41 U1.42 U1.43 U1.44 U1.45 U1.46 U1.47 U1.49 U1.50 U1.53 U1.58 U1.59 U1.60 U1.63 U1.64 U1.65 U1.73 U1.74 U1.75 U1.76 U1.77 U1.78 U1.79 U1.80 U1.81 U1.82 U1.85 U1.86 U1.96 U1.97 U1.98 U1.99 U1.100 U1.101 U1.102 U1.103 U1.104 U1.111 U1.135 U1.139 U1.140 U1.141 U1.142 U3.5 U3.6 U3.7 U6.5 U6.6 U6.7 U8.9 U8.10 U10.5 U10.6 U10.7

## Polygon pours and split planes (outlines as drawn)
GND on GND "Top Layer-No Net" (solid, remove dead copper, pour order 1000): 112.878,38.74 112.822,38.684 104.419,38.684 104.419,63.932 -56.617,63.932 -56.693,63.856 -56.693,-33.071 -56.693,-54.584 4.623,-54.584 37.363,-54.584 37.627,-54.32 75.95,-54.32 75.95,-15.47 94.4,-15.47 112.878,-15.47 112.878,-15.55
3.3V on VCC "Top Layer-No Net" (solid, remove dead copper, pour order 1001): 112.878,38.74 104.41,38.74 104.41,63.932 104.419,63.932 -56.617,63.932 -56.617,45.37 -56.617,-54.584 -56.693,-54.584 75.97,-54.584 75.97,-15.51 75.99,-15.51 112.878,-15.51 112.878,-15.32

## Keep-outs
KeepOutLayer:
  lines w0.254: 66.12,-19.761 66.12,-32.133 62.132,-32.133 62.132,-19.738 66.12,-19.738 ; 84.789,-31.955 84.789,-30.838 ; 84.789,-31.371 84.789,-22.354 84.789,-20.246 ; 84.789,-20.551 84.789,-19.865 ; 84.789,-19.738 88.802,-19.738 88.802,-31.981 84.814,-31.981 ; 104.41,38.74 112.878,38.74 112.878,-16.44 104.419,-16.44 104.419,-21.184 117.348,-21.184 117.348,-33.147 104.419,-33.147 104.419,-34.92 104.439,-34.94 112.878,-34.94 112.878,-54.548 112.867,-54.559 104.419,-54.559 ; 104.419,-54.584 56.82,-54.584 46.126,-54.584 38.16,-54.584 38.16,-34.57 3.84,-34.57 3.84,-54.584 -56.693,-54.584 -56.693,-33.071 -66.65,-33.071 -66.65,-21.184 -56.617,-21.184 -56.617,63.932 104.419,63.932 104.419,38.684

## Silkscreen, mask and mechanical layers (free items; w line width, h text height)
TopOverlay:
  circle w0.254: c52.47,-45.97 r4
  circle w0.254: c42.824,-38.794 r4
  circle w0.254: c-7.609,-10.504 r4
  circle w0.254: c-39.816,-44.54 r4
  lines w0.254: -58.716,-70.269 -58.703,-70.282 ; -28.678,-14.365 -13.97,-14.365 -13.97,-6.745 -28.678,-6.745 ; 58.503,-3.5 58.503,9.2 ; 62.5,9.19 88.177,9.19 88.177,-3.5 62.523,-3.5 ; 62.523,9.2 88.19,9.2
  text "SKD-521P  MAIN-PCB   2.0" at -7.26,59.69 h2.03
  text "SANLIAN 2013-11-01" at -7.24,55.71 h2.03
BottomOverlay:
  circle w0.254: c-60.655,-27.026 r4.927
  circle w0.254: c-44.602,58.979 r4.223
  circle w0.254: c92.329,58.979 r4.182
  circle w0.254: c110.363,-27 r4.908
  circle w0.254: c52.501,-45.912 r4.056
  circle w0.254: c42.834,-38.786 r4.003
  circle w0.254: c-7.596,-10.53 r3.998
  circle w0.254: c-39.803,-44.566 r3.988

## Text inside footprints (layer, text, board x,y; h text height)
J1: BottomOverlay "1" at 77.927,54.712 h1.52
ST3: TopOverlay "1" at -14.478,-13.868 h1.52